# EAGLE board v1 (EAGLE 9.5.1)
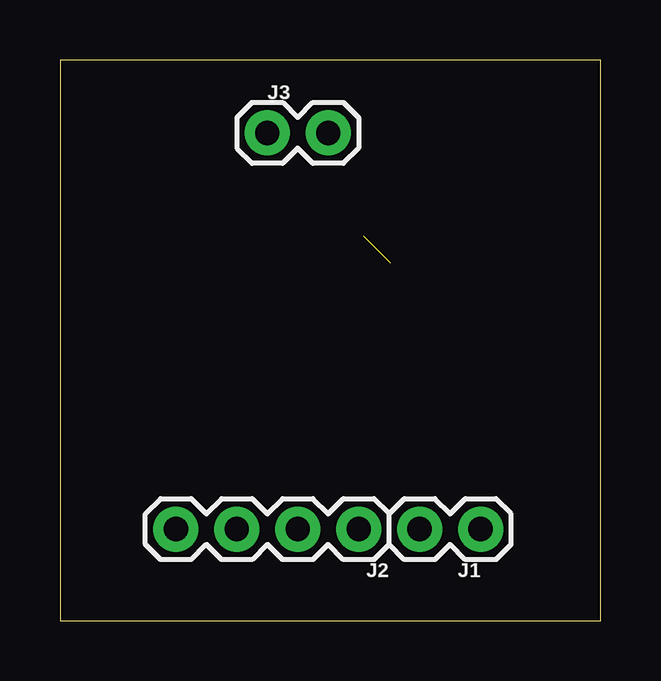
[diagram p0: board, top side]
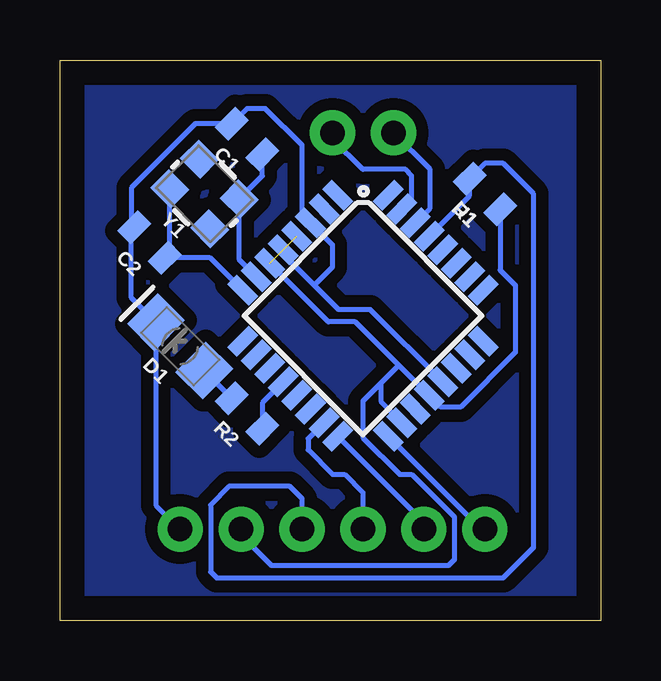
[diagram p1: board, bottom side, seen from below]

Size 22.53 x 23.36 mm. Coordinates in mm from the lower left corner, seen from the top.
Outline: 0,0 22.53,0 22.53,23.36 0,23.36 0,0
Copper layers (1*16): Top 0.035mm / dielectric 1.5mm / Bottom 0.035mm
Design rules "default": minimum track width 6mil, minimum drill 0.35mm, track to track 6mil, track to pad 6mil, pad to pad 6mil, via to via 6mil, smd to smd 6mil, copper to edge 40mil, drill to drill 6mil, minimum pad ring 10mil, minimum via ring 8mil, stop-mask expansion 4mil, vias tented up to drill 0mil, thermal gap 10mil

## Footprints (pad centres in the part's own frame; a part is rotated, then mirrored left to right if it is on the bottom)
0805 = smd 0.8 x 1.2: 1 -0.9,0; 2 0.9,0
FKIT-LED-1206 = smd 1.6 x 1.803: A -1.422,0; C 1.422,0
1X02 = drill 1.016 pad 1.88: 1 0,0; 2 2.54,0
1X04 = drill 1.016 pad 1.88: 1 0,0; 2 2.54,0; 3 5.08,0; 4 7.62,0
TQFP32-08 = smd 1.27 x 0.559: 1 -4.293,2.8; 2 -4.293,2; 3 -4.293,1.2; 4 -4.293,0.4; 5 -4.293,-0.4; 6 -4.293,-1.2; 7 -4.293,-2; 8 -4.293,-2.8; 17 4.293,-2.8; 18 4.293,-2; 19 4.293,-1.2; 20 4.293,-0.4; 21 4.293,0.4; 22 4.293,1.2; 23 4.293,2; 24 4.293,2.8 | smd 0.559 x 1.27: 9 -2.8,-4.293; 10 -2,-4.293; 11 -1.2,-4.293; 12 -0.4,-4.293; 13 0.4,-4.293; 14 1.2,-4.293; 15 2,-4.293; 16 2.8,-4.293; 25 2.8,4.293; 26 2,4.293; 27 1.2,4.293; 28 0.4,4.293; 29 -0.4,4.293; 30 -1.2,4.293; 31 -2,4.293; 32 -2.8,4.293
CRYSTAL-SMD-3.2X2.5MM = smd 1.2 x 1.1: 1 -1.175,-0.875; 2 1.175,-0.875; 3 1.175,0.875; 4 -1.175,0.875

## Placement (x,y rotation side)
C1  22pF  [0805]  14.73,20.07 135 bottom
C2  22pF  [0805]  18.8,15.75 135 bottom
D1  [FKIT-LED-1206]  17.53,11.43 135 bottom
J1  [1X02]  17.53,3.81 180 top
J2  [1X04]  12.45,3.81 180 top
J3  [1X02]  8.64,20.32 0 top
R1  10k  [0805]  4.83,17.78 135 bottom
R2  1k  [0805]  14.73,8.64 135 bottom
U1  ATMEGA328P_TQFP  [TQFP32-08]  9.91,12.7 315 bottom
Y1  [CRYSTAL-SMD-3.2X2.5MM]  16.51,17.78 135 bottom

## Library data of the parts
C1 C2 = SparkFun-Capacitors; PROD_ID: CAP-08469
D1 = SparkFun-LED
J1 J3 = SparkFun-Connectors
J2 = SparkFun-Connectors; PROD_ID: CONN-09696
R1 R2 = SparkFun-Resistors; PROD_ID: RES-09883
U1 = SparkFun-IC-Microcontroller; PROD_ID: IC-09069
Y1 = SparkFun-Clocks

## Nets
5V: J1.2 R1.1 U1.4 U1.6 U1.18 U1.20
GND: C1.2 C2.2 D1.C J1.1 U1.3 U1.5 U1.21
N$1: C1.1 U1.7 Y1.1
N$2: C2.1 U1.8 Y1.3
N$4: J2.1 R1.2 U1.29
N$6: J2.4 U1.17
N$7: J2.3 U1.16
N$8: J2.2 U1.15
N$10: R2.1 U1.12
N$11: D1.A R2.2
N$13: J3.1 U1.30
N$14: J3.2 U1.31

## Tracks (layer width: path | path; a pad name or v marks a point on that pad's centre or on a via)
5V  (1 unrouted)
  Bottom 0.203: 8.41,10.64 U1.20 6.66,8.89 5.84,8.89 3.56,11.18 3.56,13.97 4.19,14.6 R1.1 | 8.41,10.64 10.22,12.45 11.35,12.45 U1.6 | U1.18 9.14,9.11 9.14,9.91 | 8.41,10.64 9.14,9.91 | 9.14,9.91 9.91,9.14 9.91,7.62 8.38,6.1 7.87,6.1 6.1,4.32 6.1,2.54 6.35,2.29 13.72,2.29 14.99,3.56 J1.2
GND
  Bottom 0.203: U1.21 9.59,12.95 10.92,12.95 11.94,13.97 | 11.94,13.97 13.22,15.26 U1.5 | 11.94,13.97 11.18,14.73 11.18,15.67 U1.3 12.45,16.94 12.45,19.81 13.97,21.34 14.73,21.34 C1.2 16.89,20.7 19.56,18.03 19.56,16.51 | 19.56,16.51 C2.2 | D1.C 18.97,12.88 | D1.C 18.53,4.82 J1.1 | D1.C 19.56,13.46 19.56,16.51
N$1
  Bottom 0.203: U1.7 15.06,15.03 Y1.1 14.1,18.53 C1.1
N$2
  Bottom 0.203: U1.8 16.28,15.11 C2.1 17.96,15.31 Y1.3
N$4
  Bottom 0.203: U1.29 5.46,17.71 R1.2 4.83,19.05 4.06,19.05 2.79,17.78 2.79,3.05 4.06,1.78 16,1.78 16.26,2.03 16.26,4.83 15.49,5.59 12.95,5.59 12.45,5.08 J2.1
N$6
  Bottom 0.203: U1.17 4.98,3.81 J2.4
N$7
  Bottom 0.203: U1.16 7.37,4.09 J2.3
N$8
  Bottom 0.203: U1.15 12.19,7.59 12.19,7.11 11.18,6.1 10.67,6.1 9.91,5.33 J2.2
N$10
  Bottom 0.203: U1.12 14.1,9.08 R2.1
N$11
  Bottom 0.203: R2.2 D1.A
N$13
  Bottom 0.203: U1.30 7.11,17.19 7.11,18.8 J3.1
N$14
  Bottom 0.203: U1.31 7.87,17.56 7.87,18.54 8.13,18.8 9.91,18.8 11.18,20.07 J3.2
NEW
  pour Bottom (isolate 0.508): 0,0 0,23.37 22.61,23.37 22.61,0